# Altium PCB FAFMACMU_ControlPanel-V3-031115.PcbDoc (part 3 of 3)
Units mm, origin at the board's own origin, x right, y up, seen from the top; angles counter-clockwise.
Board outline 264 x 75.64 mm, 2 copper layers (Top Layer, Bottom Layer), stack 1.66 mm thick; 185 components, 162 nets, 766 pads, 792 vias.
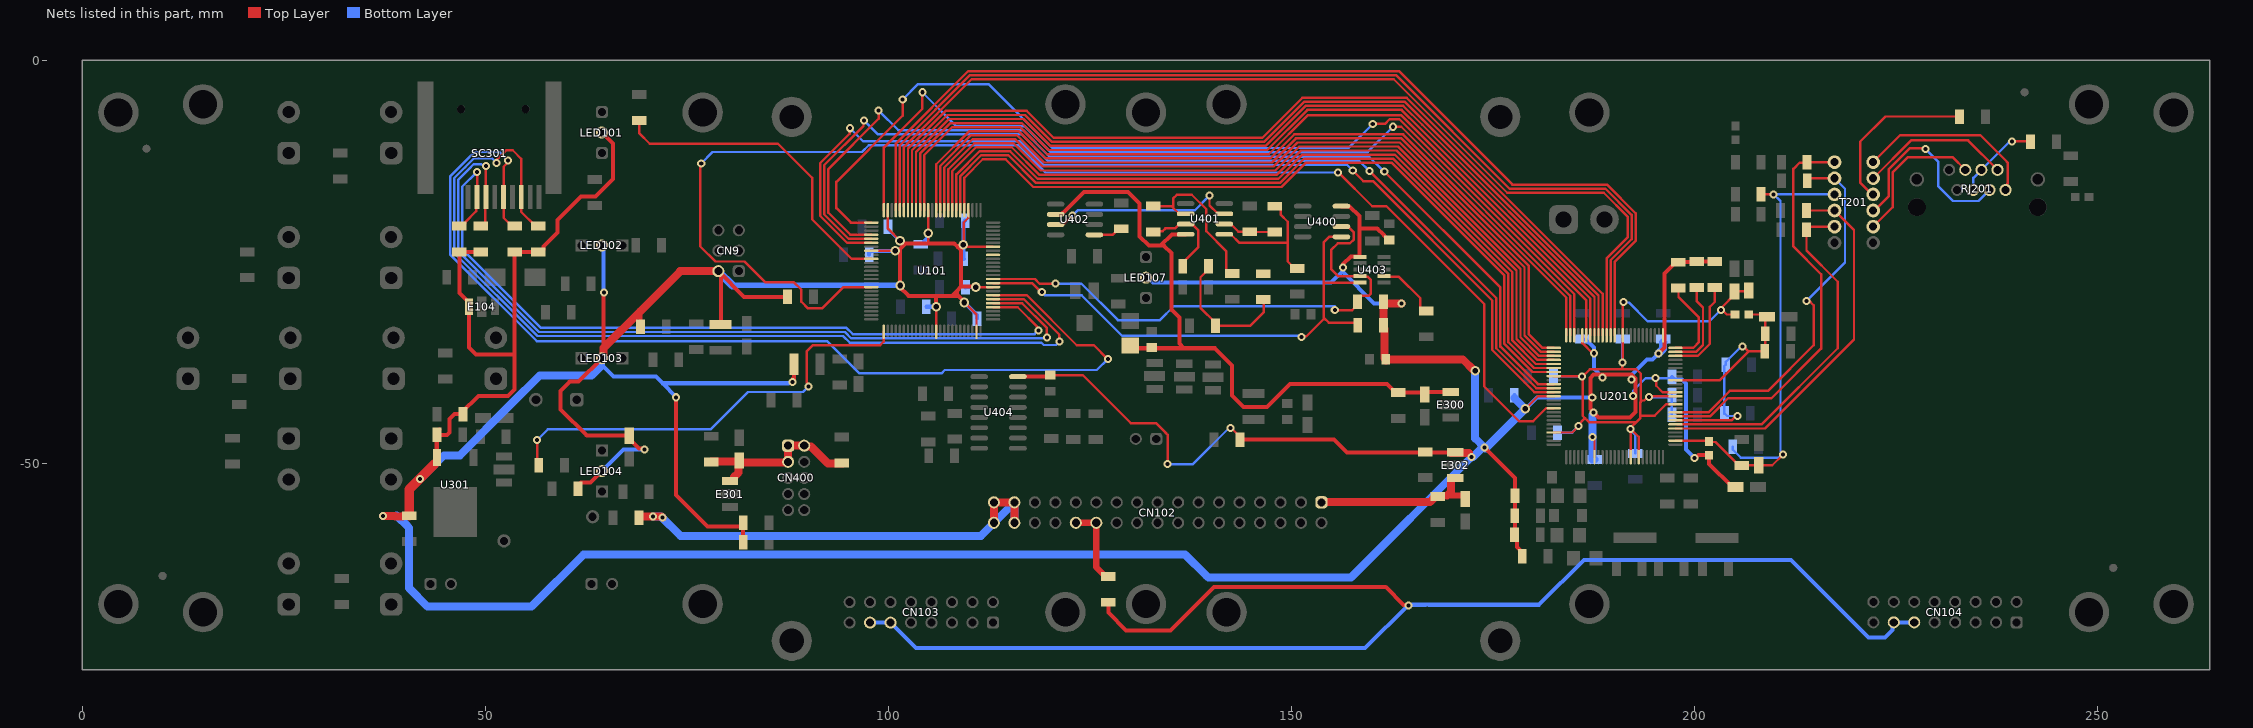
[diagram p3: the nets of this part, all layers, seen from the top]

## Via types
v1: diameter 1, hole 0.5, Top Layer to Bottom Layer, tented both sides, 636 vias
v2: diameter 1, hole 0.5, Top Layer to Bottom Layer, 146 vias
v3: diameter 1.2, hole 0.7, Top Layer to Bottom Layer, tented top, 9 vias
v4: diameter 1.2, hole 0.7, Top Layer to Bottom Layer, 1 vias

## Nets (pads, with @x,y where several pads share a name; then routed paths per layer and width w, separated by ;. In a path a pad name is that pad's centre, name@x,y a point inside that pad or via, vN(x,y) a via of type N, cw(c..) or ccw(c..) an arc to the next point about the centre after c; other vN are vias at no path point) (continued)
NetR207_1: R207.1 U201.23 | length 12.1
  Top Layer w0.3: U201.23@197.69,-36.71 200.46,-36.71 201.94,-35.23 201.94,-30.63 202.58,-29.99 R207.1@202.58,-28.21
NetR208_1: R208.1 U201.24 | length 11.2
  Top Layer w0.3: U201.24@197.69,-36.21 200.253,-36.21 201.1,-35.363 201.1,-30.71 200.35,-29.96 R208.1@200.35,-28.21
NetR209_1: R209.1 U201.25 | length 11
  Top Layer w0.3: U201.25@197.69,-35.71 199.89,-35.71 200.6,-35 200.6,-31.95 198.06,-29.41 R209.1@198.06,-28.29
NetR211_1: R211.1 T201.2 U201.9 | length 48
  Top Layer w0.3: U201.9@197.69,-43.71 201.77,-43.71 204.425,-41.055 209.151,-41.055 214.836,-35.37 214.836,-30.446 214.244,-29.854 213.996,-29.854 v2(213.94,-29.91) ; R211.1@214.04,-14.97 214.34,-14.67 T201.2@217.42,-14.67
  Bottom Layer w0.3: v2(213.94,-29.91) 218.72,-25.13 218.72,-15.97 T201.2@217.42,-14.67
NetR212_1: R212.1 T201.1 U201.8 | length 50.7
  Top Layer w0.3: U201.8@197.69,-44.21 201.977,-44.21 204.217,-41.97 209.59,-41.97 215.75,-35.81 215.75,-26.58 212.31,-23.14 212.31,-13.51 213.1,-12.72 213.97,-12.72 R212.1@214.02,-12.67 T201.1@217.42,-12.67
NetR213_2: R213.2 T201.4 U201.5 | length 47.2
  Top Layer w0.3: U201.5@197.69,-45.71 199.16,-45.71 208.79,-45.71 213.754,-40.746 219.84,-34.66 219.84,-21.09 T201.4@217.42,-18.67 R213.2@213.93,-18.67
NetR214_2: R214.2 T201.5 U201.6 | length 43.8
  Top Layer w0.3: U201.6@197.88,-45.21 208.37,-45.21 217.826,-35.754 217.826,-27.516 213.94,-23.63 R214.2@213.94,-21.05 214.32,-20.67 T201.5@217.42,-20.67
NetR215_2: R215.2 T201.10 | length 20.9
  Top Layer w0.3: T201.10@222.22,-16.67 222.07,-16.67 220.6,-15.2 220.6,-10.14 223.73,-7.01 R215.2@232.94,-7.01
NetR216_2: R216.2 RJ201.4 RJ201.5 | length 10.5
  Top Layer w0.3: v2(239.46,-10.09) 241.7,-10.09 R216.2@241.74,-10.13
  Bottom Layer w0.3: RJ201.5@234.64,-16.12 234.64,-14.62 RJ201.4@235.64,-13.62 239.036,-10.224 239.326,-10.224 v2(239.46,-10.09)
NetR301_2: R301.2 SC301.7 U101.31 | length 120.4
  Top Layer w0.3: v2(51.43,-12.76) 51.43,-12.413 52.646,-11.197 53.434,-11.197 54.5,-12.263 SC301.7@54.5,-17 54.5,-18.85 56.25,-20.6 R301.2@56.6,-20.6 ; U101.31@113.02,-29.67 116.831,-29.67 121.25,-34.089 v2(121.25,-34.93)
  Bottom Layer w0.3: v2(51.43,-12.76) 50.89,-12.22 48.6,-12.22 47.791,-13.029 47.54,-13.28 46.16,-14.66 46.16,-23.903 56.497,-34.24 94.43,-34.24 95.25,-35.06 119.006,-35.06 119.306,-35.36 120.82,-35.36 v2(121.25,-34.93)
NetR302_2: R302.2 SC301.5 U101.32 | length 133.7
  Top Layer w0.3: v2(52.85,-12.482) 52.85,-12.683 52.3,-13.234 52.3,-19.57 53.33,-20.6 R302.2@53.68,-20.6 ; U101.32@113.02,-29.17 117.205,-29.17 123.415,-35.38 125.53,-35.38 127.24,-37.09 v2(127.265,-37.09)
  Bottom Layer w0.3: v2(52.85,-12.482) 51.778,-11.41 48.703,-11.41 47.584,-12.529 47.142,-12.97 45.66,-14.452 45.66,-24.11 56.42,-34.87 92.43,-34.87 96.44,-38.88 106.617,-38.88 107.036,-38.461 125.894,-38.461 v2(127.265,-37.09)
NetR303_2: R303.2 SC301.2 U101.30 | length 107.7
  Top Layer w0.3: R303.2@49.48,-20.6 49.64,-20.6 50.04,-20.2 50.04,-17.06 SC301.2@50.1,-17 50.1,-13.2 v2(50.13,-13.17) ; U101.30@113.02,-30.17 116.624,-30.17 119.7,-33.246 v2(119.7,-34.41)
  Bottom Layer w0.3: v2(50.13,-13.17) 49.773,-13.17 49.543,-12.94 48.587,-12.94 47.998,-13.529 47.992,-13.535 46.66,-14.867 46.66,-23.696 56.704,-33.74 94.637,-33.74 95.407,-34.51 119.6,-34.51 v2(119.7,-34.41)
NetR304_2: R304.2 SC301.1 U101.29 | length 101.2
  Top Layer w0.3: R304.2@46.81,-20.6 47.16,-20.6 47.56,-20.2 47.56,-20.1 48.912,-18.748 48.912,-17.088 49.033,-16.967 49.033,-13.923 v2(49,-13.89) ; U101.29@113.02,-30.67 116.094,-30.67 118.65,-33.226 v2(118.65,-33.54)
  Bottom Layer w0.3: v2(49,-13.89) 47.16,-15.73 47.16,-23.45 56.95,-33.24 94.844,-33.24 95.614,-34.01 118.18,-34.01 v2(118.65,-33.54)
NetR312_1: R312.1 U101.1 | length 55.3
  Top Layer w0.3: v2(56.47,-47.14) 56.47,-50.06 R312.1@56.67,-50.26 ; v2(90.14,-40.49) 90.006,-40.356 90.006,-40.039 89.931,-39.964 89.931,-36.115 90.676,-35.37 99.03,-35.37 99.47,-34.93 U101.1@99.47,-33.72
  Bottom Layer w0.3: v2(56.47,-47.14) 57.78,-45.83 77.99,-45.83 82.63,-41.19 89.44,-41.19 v2(90.14,-40.49)
NetR315_1: R315.1 U101.85 | length 39.8
  Top Layer w0.3: R315.1@69.15,-7.5 69.15,-9.11 70.43,-10.39 86.349,-10.39 90.59,-14.631 90.59,-19.769 95.491,-24.67 U101.85@97.92,-24.67
NetR400_1: R400.1 R402.2 U401.1 | length 17.5
  Top Layer w0.3: U401.1@141.72,-21.62 142.52,-21.62 143.58,-22.68 149.54,-22.68 ; R400.1@147.98,-18.14 148.33,-18.14 148.73,-18.54 148.73,-19.21 149.58,-20.06 149.58,-22.68 149.58,-25 150.43,-25.85 R402.2@150.78,-25.85
NetR400_2: R400.2 R401.1 U401.2 | length 6.7
  Top Layer w0.3: U401.2@141.72,-20.35 142.52,-20.35 143.47,-21.3 R401.1@144.87,-21.3 144.91,-21.34 R400.2@147.98,-21.34
NetR403_2: R403.2 U402.5 | length 3.7
  Top Layer w0.3: U402.5@125.59,-21.69 127.84,-21.69 128.59,-20.94 R403.2@128.94,-20.94
NetR405_1: R405.1 U101.35 U400.5 U403.5 | length 65.8
  Top Layer w0.3: U101.35@113.02,-27.67 117.86,-27.67 118.98,-28.79 v2(119.07,-28.79) ; v2(151.28,-34.38) 151.387,-34.273 151.917,-34.273 154.05,-32.14 154.05,-31.96 ; U400.5@156.24,-21.94 154.72,-21.94 154.04,-22.62 154.04,-27.61 154.05,-27.62 ; R405.1@158.265,-32.89 157.975,-32.6 154.69,-32.6 154.14,-32.05 154.05,-31.96 ; U403.5@158.54,-27.61 158.53,-27.62 154.05,-27.62 ; 154.05,-31.96 154.05,-27.62
  Bottom Layer w0.3: v2(119.07,-28.79) 119.48,-29.2 124.034,-29.2 129.035,-34.201 151.101,-34.201 v2(151.28,-34.38)
NetR406_1: R406.1 U101.36 U400.6 U403.4 | length 66.6
  Top Layer w0.3: U101.36@113.02,-27.17 118.214,-27.17 118.794,-27.75 v2(120.78,-27.75) ; v2(155.42,-31.02) 157.59,-31.02 158.25,-30.36 R406.1@158.25,-30.01 158.25,-29.667 158.65,-29.267 159.583,-29.267 159.9,-28.95 159.9,-27.284 159.526,-26.91 159.366,-26.91 158.64,-26.91 U403.4@158.54,-26.81 158.505,-26.845 155.865,-26.845 154.96,-25.94 154.96,-23.58 155.8,-22.74 157.3,-22.74 157.79,-22.251 157.79,-21.42 157.04,-20.67 U400.6@156.24,-20.67
  Bottom Layer w0.3: v2(120.78,-27.75) 123.998,-27.75 128.518,-32.27 133.729,-32.27 135.449,-30.55 155.409,-30.55 v2@155.449,-30.59
NetR407_1: R407.1 R409.2 R411.1 | length 16.8
  Top Layer w0.3: R411.1@139.76,-25.6 139.76,-25.95 138.76,-26.95 138.76,-30.75 140.61,-32.6 R407.1@140.61,-32.95 144.96,-32.95 146.63,-31.28 146.63,-29.8 R409.2@146.54,-29.71
NetR409_1: R409.1
NetR410_1: R410.1 R413.2 U401.6 | length 20.1
  Top Layer w0.3: R413.2@132.9,-18.13 135.17,-18.13 135.37,-18.33 ; U401.6@136.92,-19.08 136.12,-19.08 135.37,-18.33 ; R410.1@142.69,-26.48 142.34,-26.48 141.94,-26.08 141.94,-23.701 139.47,-21.231 139.47,-18.499 137.681,-16.71 135.83,-16.71 135.37,-17.17 135.37,-18.33
NetR411_2: R411.2 R413.1 U401.7 | length 11.6
  Top Layer w0.3: R413.1@132.9,-21.33 133.004,-21.226 134.074,-21.226 134.411,-20.889 135.581,-20.889 136.12,-20.35 137.72,-20.35 138.47,-21.1 138.47,-23.26 136.96,-24.77 136.96,-25.2 R411.2@136.56,-25.6
NetR412_1: R412.1 U403.7 | length 7.7
  Top Layer w0.3: U403.7@161.54,-26.81 161.64,-26.91 163.39,-26.91 166.04,-29.56 166.04,-30.74 166.44,-31.14 R412.1@166.79,-31.14
NetRJ201_1: RJ201.1 T201.12 | length 23
  Top Layer w0.3: T201.12@222.22,-12.67 225.55,-9.34 235.528,-9.34 238.79,-12.602 238.9,-12.712 238.9,-15.344 238.87,-15.375 238.87,-15.89 238.79,-15.97 RJ201.1@238.64,-16.12
NetRJ201_2: RJ201.2 T201.11 | length 18.9
  Top Layer w0.3: T201.11@222.22,-14.67 226.92,-9.97 233.99,-9.97 RJ201.2@237.64,-13.62
NetRJ201_3: RJ201.3 T201.9 | length 24.6
  Top Layer w0.3: T201.9@222.22,-18.67 222.39,-18.67 224.13,-16.93 224.13,-13.57 226.74,-10.96 228.628,-10.96 v2(228.718,-11.05)
  Bottom Layer w0.3: v2(228.718,-11.05) 230.3,-12.632 230.3,-15.67 232.12,-17.49 235.27,-17.49 RJ201.3@236.64,-16.12
NetRJ201_6: RJ201.6 T201.8 | length 18.2
  Top Layer w0.3: T201.8@222.22,-20.67 224.63,-18.26 224.63,-13.95 226.54,-12.04 232.06,-12.04 RJ201.6@233.64,-13.62
NetU101_42: U101.42
NetU101_55: U101.55 U201.57 | length 96.5
  Top Layer w0.3: U101.55@109.47,-18.62 109.47,-14.604 111.754,-12.32 114.583,-12.32 118.013,-15.75 148.82,-15.75 151.84,-12.73 162.45,-12.73 176.46,-26.74 176.46,-35.158 176.465,-35.228 179.947,-38.71 U201.57@182.59,-38.71
NetU101_56: U101.56 U201.56 | length 97.3
  Top Layer w0.3: U101.56@108.97,-18.62 108.97,-14.397 111.547,-11.82 114.929,-11.82 118.359,-15.25 148.613,-15.25 151.633,-12.23 162.66,-12.23 176.96,-26.53 176.96,-34.951 176.965,-35.021 180.154,-38.21 U201.56@182.59,-38.21
NetU101_57: U101.57 U201.55 | length 98.1
  Top Layer w0.3: U101.57@108.47,-18.62 108.47,-14.19 111.34,-11.32 115.136,-11.32 118.566,-14.75 148.406,-14.75 151.426,-11.73 162.867,-11.73 177.46,-26.323 177.46,-34.744 177.465,-34.814 180.361,-37.71 U201.55@182.59,-37.71
NetU101_58: U101.58 U201.54 | length 99.1
  Top Layer w0.3: U101.58@107.97,-18.62 107.97,-15.041 107.97,-13.768 110.918,-10.82 115.343,-10.82 118.773,-14.25 148.199,-14.25 151.219,-11.23 163.074,-11.23 177.96,-26.116 177.96,-34.536 177.965,-34.606 180.568,-37.21 U201.54@182.59,-37.21
NetU101_59: U101.59 U201.53 | length 99.9
  Top Layer w0.3: U101.59@107.47,-18.62 107.47,-15.248 107.47,-13.561 110.711,-10.32 115.55,-10.32 118.94,-13.71 148.032,-13.71 151.012,-10.73 163.281,-10.73 178.46,-25.909 178.46,-34.329 178.465,-34.399 180.775,-36.71 U201.53@182.59,-36.71
NetU101_60: U101.60 U201.52 | length 100.7
  Top Layer w0.3: U101.60@106.97,-18.62 106.97,-15.455 106.97,-13.354 110.504,-9.82 115.758,-9.82 119.148,-13.21 147.824,-13.21 150.804,-10.23 163.488,-10.23 178.96,-25.702 178.96,-34.122 178.96,-34.138 178.962,-34.161 178.965,-34.192 179.134,-34.362 180.993,-36.21 U201.52@182.59,-36.21
NetU101_61: U101.61 U201.51 | length 101.5
  Top Layer w0.3: U101.61@106.47,-18.62 106.47,-15.663 106.47,-13.147 110.297,-9.32 115.965,-9.32 119.355,-12.71 147.617,-12.71 150.597,-9.73 163.696,-9.73 179.46,-25.494 179.46,-33.97 181.2,-35.71 U201.51@182.59,-35.71
NetU101_62: U101.62 U201.50 | length 101.3
  Top Layer w0.3: U101.62@105.97,-18.62 105.97,-12.94 110.09,-8.82 116.172,-8.82 119.562,-12.21 147.41,-12.21 150.39,-9.23 163.903,-9.23 184.14,-29.467 U201.50@184.14,-34.16
NetU101_65: U101.65 U201.45 | length 107.7
  Top Layer w0.3: U101.65@104.47,-18.62 104.47,-11.814 107.964,-8.32 116.379,-8.32 119.749,-11.69 147.223,-11.69 152.083,-6.83 163.647,-6.83 186.64,-29.823 U201.45@186.64,-34.16
NetU101_66: U101.66 U201.44 | length 109.4
  Top Layer w0.3: U101.66@103.97,-18.62 103.97,-11.607 107.757,-7.82 116.586,-7.82 119.926,-11.16 147.046,-11.16 152.016,-6.19 163.714,-6.19 165.77,-8.246 187.14,-29.616 U201.44@187.14,-34.16
NetU101_67: U101.67 U201.43 | length 111.1
  Top Layer w0.3: U101.67@103.47,-18.62 103.47,-11.4 107.55,-7.32 116.793,-7.32 120.133,-10.66 146.839,-10.66 151.809,-5.69 163.922,-5.69 166.27,-8.038 187.64,-29.409 U201.43@187.64,-34.16
NetU101_68: U101.68 U201.42 | length 112.8
  Top Layer w0.3: U101.68@102.97,-18.62 102.97,-11.193 107.343,-6.82 117,-6.82 120.34,-10.16 146.632,-10.16 151.602,-5.19 164.129,-5.19 188.14,-29.201 U201.42@188.14,-34.16
NetU101_69: U101.69 U201.41 | length 114.4
  Top Layer w0.3: U101.69@102.47,-18.62 102.47,-10.986 107.136,-6.32 117.207,-6.32 120.547,-9.66 146.425,-9.66 151.395,-4.69 164.336,-4.69 188.64,-28.994 U201.41@188.64,-34.16
NetU101_70: U101.70 U201.40 | length 123.5
  Top Layer w0.3: U101.70@101.97,-18.14 101.97,-10.779 110.369,-2.38 162.733,-2.38 176.817,-16.464 188.787,-16.464 191.747,-19.424 191.747,-22.021 189.14,-24.628 U201.40@189.14,-34.16
NetU101_71: U101.71 U201.39 | length 125.6
  Top Layer w0.3: U101.71@101.47,-18.62 101.47,-10.572 110.162,-1.88 163.031,-1.88 177.116,-15.964 188.994,-15.964 192.247,-19.217 192.247,-22.228 189.64,-24.835 189.64,-28.9 U201.39@189.64,-34.16
NetU101_72: U101.72 U201.38 | length 127.3
  Top Layer w0.3: U101.72@100.97,-18.62 100.97,-10.364 109.954,-1.38 163.377,-1.38 177.462,-15.464 189.202,-15.464 192.747,-19.01 192.747,-22.435 190.14,-25.042 U201.38@190.14,-34.16
NetU101_75: U101.75 U201.49 | length 115
  Top Layer w0.3: U101.75@99.47,-18.62 99.47,-17.87 99.47,-17.663 99.48,-17.653 99.48,-10.84 104.25,-6.07 v2(104.25,-4) ; v2(162.63,-8.28) 163.66,-8.28 184.64,-29.26 U201.49@184.64,-34.16
  Bottom Layer w0.3: v2(104.25,-4) 108.45,-8.2 116.943,-8.2 120.163,-11.42 159.49,-11.42 v2(162.63,-8.28)
NetU101_76: U101.76 U201.48 | length 124.9
  Top Layer w0.3: U101.76@97.92,-20.17 95.38,-20.17 93.59,-18.38 93.59,-15.12 101.82,-6.89 v2(101.82,-4.9) ; v2(160.13,-7.92) 161.646,-7.92 162.236,-7.33 163.417,-7.33 185.14,-29.053 U201.48@185.14,-34.16
  Bottom Layer w0.3: v2(101.82,-4.9) 103.73,-2.99 112.44,-2.99 120.37,-10.92 157.13,-10.92 v2(160.13,-7.92)
NetU101_79: U101.79 U201.60 | length 123.8
  Top Layer w0.3: U101.79@97.92,-21.67 95.32,-21.67 92.59,-18.94 92.59,-13.52 98.82,-7.29 v2(98.82,-6.26) ; v2(161.56,-13.84) 175.96,-28.24 175.96,-35.553 180.617,-40.21 U201.60@182.59,-40.21
  Bottom Layer w0.3: v2(98.82,-6.26) 101.26,-8.7 116.736,-8.7 120.056,-12.02 159.7,-12.02 161.52,-13.84 v2(161.56,-13.84)
NetU101_80: U101.80 U201.61 | length 123.8
  Top Layer w0.3: v2(97,-7.49) 96.948,-7.542 96.948,-8.182 92.09,-13.04 92.09,-19.147 95.113,-22.17 U101.80@97.92,-22.17 ; v2(159.73,-13.79) 175.46,-29.52 175.46,-35.76 180.41,-40.71 U201.61@182.59,-40.71
  Bottom Layer w0.3: v2(97,-7.49) 98.71,-9.2 116.529,-9.2 119.849,-12.52 158.46,-12.52 v2(159.73,-13.79)
NetU101_81: U101.81 U201.62 | length 124.6
  Top Layer w0.3: v2(95.293,-8.463) 95.234,-8.522 95.234,-9.147 91.59,-12.791 91.59,-19.354 94.906,-22.67 U101.81@97.92,-22.67 ; v2(157.65,-13.71) 158.96,-15.02 160.143,-15.02 174.96,-29.837 174.96,-35.98 180.19,-41.21 U201.62@182.59,-41.21
  Bottom Layer w0.3: v2(95.293,-8.463) 96.9,-10.07 116.35,-10.07 119.3,-13.02 156.96,-13.02 v2(157.65,-13.71)
NetU101_92: U101.92 U201.66 | length 164.3
  Top Layer w0.3: v2(76.825,-12.826) 76.68,-12.97 76.68,-23.097 78.583,-25 82.197,-25 84.787,-27.59 88.32,-27.59 89.24,-28.51 89.24,-29.996 90.064,-30.82 91.81,-30.82 94.46,-28.17 U101.92@97.92,-28.17 ; v2(155.82,-13.97) 155.897,-13.97 160.063,-18.137 161.823,-18.137 173.96,-30.274 173.96,-40.5 178.28,-44.82 180.023,-44.82 181.633,-43.21 181.84,-43.21 U201.66@182.59,-43.21
  Bottom Layer w0.3: v2(76.825,-12.826) 78.24,-11.41 96.772,-11.41 97.612,-10.57 116.143,-10.57 119.533,-13.96 155.81,-13.96 v2(155.82,-13.97)
NetU401_3: U401.3 U402.3 | length 24.1
  Top Layer w0.3: U402.3@120.79,-20.42 121.671,-20.42 121.821,-20.27 121.9,-20.27 v2(122.888,-19.281) ; v2(139.88,-16.82) 139.88,-18.04 140.92,-19.08 U401.3@141.72,-19.08
  Bottom Layer w0.3: v2(122.888,-19.281) 123.51,-18.66 138.04,-18.66 v2(139.88,-16.82)
V1.8A: C212.2 C213.2 C222.1 C223.2 C224.2 FT203.2 U201.7 U201.17 | length 39.3
  Top Layer w0.3: U201.7@197.69,-44.71 204.621,-44.71 205.171,-44.16 v2(205.36,-44.16) ; U201.17@197.69,-39.71 203.194,-39.71 206.754,-36.15 ; v2(206.03,-35.53) 206.134,-35.53 206.754,-36.15 ; FT203.2@206.77,-31.57 208.75,-31.57 C222.1@209.03,-31.85 208.82,-32.06 C223.2@208.82,-33.96 208.82,-36.1 C224.2@208.77,-36.15 206.754,-36.15
  Bottom Layer w0.3: C213.2@203.74,-43.87 203.74,-37.983 C212.2@203.929,-37.793 203.929,-37.443 205.843,-35.53 v2(206.03,-35.53) ; C213.2@203.77,-43.82 204.11,-44.16 v2(205.36,-44.16)
V1.8D: C201.1 C202.1 C203.1 C204.1 C205.1 C206.1 C220.1 C221.1 FT203.1 U201.11 U201.13 U201.36 U201.58 U201.72 U201.92 U201.94 | length 98.7
  Top Layer w0.3: U201.72@182.59,-46.21 184.881,-46.21 v2(185.671,-45.42) 185.515,-45.42 185.5,-45.405 186.472,-44.433 ; U201.58@182.59,-39.21 v2@186.088,-39.21 ; v2@186.121,-39.211 v2@186.17,-39.26 ; 191.11,-38.36 v2(191.11,-37.5) 191.14,-37.47 U201.36@191.14,-34.16 191.14,-30.1 v2(191.22,-30.02) ; U201.92@192.14,-49.26 v2@192.14,-45.76 ; U201.94@193.14,-49.26 193.14,-46.76 v2@192.14,-45.76 ; 193.38,-42.45 193.38,-41.53 193.38,-38.91 192.83,-38.36 187.07,-38.36 v2@186.17,-39.26 ; v2@194.24,-41.82 193.823,-42.238 193.552,-42.238 193.34,-42.45 193.34,-44.03 ; v2@194.43,-41.71 U201.13@197.69,-41.71 ; U201.11@197.69,-42.71 196.526,-42.71 195.116,-44.12 193.43,-44.12 193.34,-44.03 ; v2(203.31,-31.02) 203.499,-31.02 204.049,-31.57 FT203.1@205.07,-31.57 ; v2@203.444,-30.666 205.01,-29.1 C221.1@205.01,-28.7 206.65,-28.7 C220.1@206.76,-28.81 ; v2@186.17,-39.26 186.17,-44.13 187,-44.96 192.78,-44.96 ; v2@192.14,-45.76 v2(192.13,-45.75) 192.13,-45.61 192.78,-44.96 ; 192.78,-44.96 193.34,-44.4 193.34,-44.03
  Bottom Layer w0.3: C203.1@182.56,-39.24 182.565,-39.245 v2(186.088,-39.245) ; C204.1@183.04,-46.22 184.871,-46.22 v2(185.671,-45.42) ; v2(191.11,-37.5) 191.11,-34.64 C202.1@191.14,-34.61 ; v2(191.22,-30.02) 191.284,-30.084 191.9,-30.084 194.226,-32.41 201.92,-32.41 v2(203.31,-31.02) ; v2(192.13,-45.75) 192.13,-45.939 192.69,-46.499 C201.1@192.69,-48.81 ; v2(194.43,-41.82) 197.03,-41.82 C205.1@197.24,-41.61 C206.1@197.24,-44.01
V3.3: C105.1 C106.1 C107.1 C108.2 C109.2 C110.2 C111.2 C112.2 C207.2 C208.2 C209.2 C210.2 C211.2 C217.1 C305.2 C306.1 C307.2 C400.1 C405.1 C407.1 CN9.2 E104.1 E302.1 FT201.1 L101.1 L102.1 LED101.2 LED102.2 LED103.2 LED104.2 LED107.2 R101.2 R102.1 R104.2 R105.2 R106.2 R107.2 R203.2 R204.2 R205.2 R206.2 R207.2 R208.2 R209.2 R301.1 R302.1 R303.1 R304.1 R307.2 R313.2 R405.2 R406.2 U101.14 U101.24 U101.34 U101.44 U101.54 U101.64 U101.74 U101.83 U201.14 U201.26 U201.46 U201.63 U201.83 U301.3 U400.8 U403.1 U404.16 | length 793.2
  Top Layer w0.3: U101.83@97.92,-23.67 v3@100.56,-23.67 ; U101.74@99.97,-18.62 99.97,-20.91 v3@101.505,-22.445 ; v3(101.48,-22.41) 101.724,-22.41 102.054,-22.74 102.19,-22.74 ; 104.96,-22.74 104.96,-21.49 v3(104.97,-21.48) U101.64@104.97,-18.62 ; U101.14@105.97,-33.72 v3(105.97,-30.62) ; v3(109.341,-22.917) v3@109.39,-22.917 ; v3@109.39,-22.922 v3@109.39,-22.917 ; v3(109.47,-30.08) 110.97,-31.58 U101.24@110.97,-33.72 ; U101.54@109.97,-18.62 109.97,-19.577 109.39,-20.157 v3@109.39,-22.917 ; v3(110.87,-28.17) U101.34@113.02,-28.17 ; U101.44@113.02,-23.17 109.838,-23.17 109.585,-22.917 v3@109.39,-22.917 ; C407.1@120.11,-39.09 124.16,-39.09 130.11,-45.04 133.227,-45.04 134.47,-46.283 134.68,-46.493 v2(134.68,-50.14) ; v2(142.49,-45.63) 142.54,-45.63 143.65,-46.74 R107.2@143.65,-47.09 ; v4(179.04,-43.27) 179.06,-43.27 180.62,-41.71 U201.63@182.59,-41.71 ; U201.46@186.14,-34.16 186.14,-35.117 187.403,-36.38 v2(187.6,-36.38) ; v2(187.4,-46.786) 187.4,-46.976 187.64,-47.216 U201.83@187.64,-49.26 ; v2(195.19,-39.46) 195.3,-39.57 195.3,-40.41 196.1,-41.21 U201.14@197.69,-41.21 ; U201.26@196.14,-34.16 196.14,-33.41 196.34,-33.21
  Top Layer w0.5: C307.2@44,-46.2 C307.2@44.33,-45.87 ; U301.3@44.01,-49.295 C307.2@44.01,-46.51 ; U301.3@44.015,-49.845 U301.3@44.015,-49.295 ; C307.2@44.04,-46.51 45.27,-46.51 45.59,-46.19 45.59,-44.55 46.21,-43.93 C305.2@47.26,-43.93 ; C305.2@47.085,-43.755 49.18,-41.66 52.84,-41.66 53.65,-40.85 53.65,-36.56 ; R303.1@49.48,-23.8 R304.1@46.81,-23.8 46.81,-28.91 48.01,-30.11 E104.1@48.01,-30.61 48.01,-35.68 48.89,-36.56 53.65,-36.56 ; R307.2@61.53,-53.51 R307.2@61.53,-53.16 61.53,-52.81 61.93,-52.41 63.09,-52.41 LED104.2@64.5,-51 ; LED101.2@64.5,-9 65.881,-10.381 65.881,-14.786 63.728,-16.94 61.9,-16.94 59.01,-19.83 59.01,-21.39 57.25,-23.15 57.25,-23.5 56.95,-23.8 R301.1@56.6,-23.8 R302.1@53.68,-23.8 53.65,-23.83 53.65,-36.56 ; LED103.2@64.691,-36.809 LED103.2@64.5,-37 61.59,-39.91 60.51,-39.91 59.38,-41.04 59.38,-43.37 62.62,-46.61 C306.1@67.91,-46.61 67.91,-47.01 69.104,-48.204 69.714,-48.204 v2(69.81,-48.3) ; 64.691,-35.749 64.691,-28.949 64.77,-28.87 v2(64.77,-28.84) ; R101.2@69.28,-33.07 69.28,-31.16 ; v2(73.68,-41.84) 73.68,-53.981 77.589,-57.89 81.95,-57.89 82.03,-57.97 R104.2@82.03,-59.8 ; 74.18,-26.26 74.18,-26.2 ; CN9.2@78.772,-26.2 78.856,-26.284 78.856,-26.2 CN9.2@78.94,-26.2 82.14,-29.4 R102.1@87.53,-29.4 ; L102.1@79.21,-32.8 79.28,-32.73 CN9.2@79.28,-26.811 ; R105.2@82.03,-57.7 R105.2@82.03,-57.42 ; v2(88.13,-39.96) 88.226,-39.864 88.226,-39.514 88.34,-39.4 ; v2@88.34,-39.96 88.34,-39.4 ; L101.1@88.35,-37.74 88.34,-37.75 88.34,-39.4 ; v3@100.56,-23.67 v3(100.889,-23.67) ; v3@101.47,-27.924 101.47,-23.46 102.19,-22.74 108.21,-22.74 108.635,-23.165 ; v3@101.48,-22.599 v3(101.48,-22.41) ; v3@101.51,-28.2 102.48,-29.17 102.56,-29.25 105.97,-29.25 ; v3(105.97,-30.62) 105.97,-29.25 ; 107.93,-29.25 108.53,-28.65 ; 108.6,-29.25 105.97,-29.25 ; v3(109.341,-22.917) 109.207,-23.051 108.749,-23.051 108.635,-23.165 ; v3(109.47,-30.08) 109.47,-30.051 108.53,-29.111 108.53,-28.65 ; v3(110.87,-28.17) 110.82,-28.12 109.06,-28.12 ; U404.16@116.11,-39.28 119.92,-39.28 C407.1@120.11,-39.09 ; R107.2@143.65,-47.09 155.308,-47.09 156.928,-48.71 169.82,-48.71 E302.1@169.84,-48.73 ; U400.8@156.24,-18.13 156.259,-18.149 157.259,-18.149 158.47,-19.36 158.47,-20.88 158.5,-20.88 ; v1(156.43,-25.75) 156.43,-25.33 157.41,-24.35 U403.1@158.25,-24.35 ; U403.1@158.54,-24.41 158.5,-24.41 158.5,-20.88 ; R405.2@161.295,-33.06 R405.2@161.603,-33.367 ; R406.2@161.45,-30.01 161.458,-30.018 R406.2@161.64,-30.2 ; R405.2@161.458,-32.882 R405.2@161.465,-32.89 ; C405.1@161.603,-37.003 C405.1@161.74,-37.14 ; C400.1@162.16,-22.31 162.06,-22.31 161.5,-21.75 161.5,-21.692 160.688,-20.88 158.5,-20.88 ; v3@172.71,-38.54 v3(172.84,-38.54) ; v2(173.97,-48.06) 176.455,-50.545 177.78,-51.87 R204.2@177.78,-54.056 177.78,-56.5 R206.2@177.75,-56.53 177.75,-58.87 R205.2@177.71,-58.91 178.01,-59.21 178.01,-60.419 178.37,-60.779 178.37,-60.92 178.67,-61.22 R203.2@178.67,-61.57 ; v2@188.49,-39.04 188.64,-39.19 v2(188.64,-39.363) ; v2@192.74,-39.61 v2@192.74,-39.52 ; v2(195.59,-36.4) 196.34,-35.65 196.34,-33.21 196.34,-26.46 197.71,-25.09 R209.2@198.06,-25.09 198.1,-25.05 200.31,-25.05 R208.2@200.35,-25.01 R207.2@202.58,-25.01 ; v2(200.03,-49.35) 200.219,-49.35 200.539,-49.03 FT201.1@201.87,-49.03 201.87,-50.11 204.74,-52.98 C217.1@205.14,-52.98 ; 108.53,-28.65 109.06,-28.12 ; 108.635,-23.165 109.06,-23.59 109.06,-28.12 ; v2@192.74,-39.52 192.74,-43.66 192.04,-44.36 188.16,-44.36 v2(187.52,-43.72) 187.12,-43.32 187.12,-41.66 187.12,-39.44 187.52,-39.04 192.26,-39.04 v2@192.74,-39.52
  Top Layer w1: v2(37.33,-56.55) 38.841,-56.55 38.911,-56.62 39.767,-56.62 39.797,-56.59 40.19,-56.59 40.24,-56.54 R313.2@40.59,-56.54 ; LED103.2@64.691,-36.809 64.691,-35.749 69.28,-31.16 74.18,-26.26 ; 74.18,-26.2 CN9.2@78.772,-26.2 ; R405.2@161.458,-32.882 R406.2@161.458,-30.018 ; C405.1@161.603,-37.003 R405.2@161.603,-33.367 ; R406.2@161.64,-30.2 v2(163.7,-30.2) ; C405.1@161.79,-37.29 161.79,-37.13 171.3,-37.13 v3@172.71,-38.54 ; E302.1@169.84,-48.73 172.046,-48.73
  Top Layer w1.2: R313.2@40.59,-56.54 40.59,-53.26 U301.3@43.755,-50.095
  Bottom Layer w0.3: C106.1@99.97,-20.67 99.97,-21.02 101.36,-22.41 v3(101.48,-22.41) ; v2(134.68,-50.14) 137.815,-50.14 142.325,-45.63 v2(142.49,-45.63) ; v2(192.43,-41.67) 192.43,-41.036 194.006,-39.46 197.13,-39.46 C209.2@197.24,-39.35
  Bottom Layer w0.5: LED104.2@64.5,-51 67.2,-48.3 v2(69.81,-48.3) ; 64.5,-37.85 65.94,-39.29 71.19,-39.29 72,-40.1 ; LED103.2@64.5,-37.231 LED103.2@64.5,-37 ; LED102.2@64.5,-23 64.674,-23.174 64.674,-28.744 v2(64.77,-28.84) ; v2(73.68,-41.84) 73.68,-41.78 72,-40.1 ; v2(88.13,-39.96) 88.034,-40.056 87.681,-40.056 87.636,-40.1 72,-40.1 ; C107.1@97.66,-24.13 97.66,-23.97 97.96,-23.67 v3(100.889,-23.67) ; C105.1@104.34,-22.67 104.97,-22.04 v3(104.97,-21.48) ; C110.2@104.74,-30.61 105.96,-30.61 v3(105.97,-30.62) ; C108.2@109.39,-24.67 109.346,-24.626 109.346,-22.922 v3(109.341,-22.917) 109.346,-22.912 109.346,-20.144 C109.2@109.57,-19.92 ; v3(109.47,-30.08) 111.05,-31.66 C112.2@111.05,-32.09 ; C111.2@109.59,-28.21 109.63,-28.17 v3(110.87,-28.17) ; LED107.2@132,-27 132.271,-27 132.871,-27.6 154.98,-27.6 156.43,-26.15 v1(156.43,-25.75) ; 156.43,-26.33 160.3,-30.2 v2(163.7,-30.2) ; C207.2@177.69,-41.92 C207.2@177.69,-41.57 ; v4@179.06,-43.27 180.48,-41.85 184.45,-41.85 185.764,-41.85 187.359,-41.85 v2(187.361,-41.848) ; C208.2@186.55,-34.66 187.578,-35.688 187.578,-38.301 v2(188.64,-39.363) ; v2(192.25,-39.61) 192.25,-39.095 194.169,-37.176 194.814,-37.176 v2(195.59,-36.4) ; C209.2@197.24,-39.35 197.54,-39.65 198.52,-39.65 199.01,-40.14 199.01,-48.33 v2(200.03,-49.35)
  Bottom Layer w0.7: 80.704,-27.964 v3@101.163,-27.964
  Bottom Layer w1: v2(37.33,-56.55) 39.13,-56.55 40.37,-57.79 ; 39.021,-56.51 40.547,-58.036 40.547,-65.514 42.835,-67.801 55.778,-67.801 62.239,-61.34 136.85,-61.34 139.437,-63.927 139.73,-64.22 141.586,-64.22 cw(c142,-68.5) 142.414,-64.22 157.428,-64.22 172.36,-49.288 v2(172.36,-49.23) 172.56,-49.23 173.73,-48.06 v2(173.97,-48.06) ; v2(41.93,-52) 44.89,-49.04 46.89,-49.04 53.24,-42.69 56.791,-39.139 63.211,-39.139 64.404,-37.946 64.404,-37.231 LED103.2@64.5,-37.231 ; CN9.2@78.94,-26.2 80.704,-27.964 ; v3(172.84,-38.54) 172.84,-46.93 v2@173.907,-47.998 ; v2@174.12,-48.21 179.04,-43.29 v4(179.04,-43.27) ; C207.2@177.69,-41.92 v4(179.04,-43.27) ; v4@179.06,-43.27 v4(179.04,-43.27) ; v2@187.4,-44.042 v2(187.4,-46.786) 187.4,-49.53 187.45,-49.58 C211.2@187.65,-49.58 ; v2(195.59,-36.4) 196.135,-35.855 196.135,-35.035 C210.2@196.2,-35.035
  other v3: 101.52,-27.974
V3.3A: C214.2 C218.1 C219.2 C226.2 FT201.2 T201.3 U201.2 | length 64.3
  Top Layer w0.3: U201.2@197.69,-47.21 201.75,-47.21 201.934,-47.394 202.644,-47.394 205.55,-50.3 C219.2@205.9,-50.3 205.92,-50.28 C218.1@208.03,-50.28 209.7,-50.28 v2(211.05,-48.93) ; C226.2@208.32,-16.66 v2(209.87,-16.66)
  Bottom Layer w0.3: C214.2@204.8,-47.99 204.8,-48.34 205.8,-49.34 210.451,-49.34 210.861,-48.93 v2(211.05,-48.93) 210.72,-48.6 210.72,-17.51 v2(209.87,-16.66) 209.875,-16.665 217.415,-16.665 T201.3@217.42,-16.67
V3.3P: C308.1 C309.2 CN102.1 E302.3 | length 21.2
  Top Layer w0.75: CN102.1@153.77,-54.87 CN102.1@153.78,-54.86 ; C309.2@167.665,-54.421 167.665,-54.335 C309.2@167.84,-54.16 ; C309.2@168.19,-54.16 C309.2@167.84,-54.16 ; C308.1@171.6,-54.44 171.6,-54.275 171.375,-54.05 169.82,-54.05 169.47,-54.05 169.33,-54.05 168.98,-54.05 168.19,-54.05 167.95,-54.05 C309.2@167.84,-54.16
  Top Layer w1: CN102.1@153.78,-54.86 167.226,-54.86 C309.2@167.665,-54.421 ; 169.33,-54.05 169.82,-53.56 E302.3@169.82,-51.91
V5: CN102.31 CN102.32 CN102.33 CN102.34 F301.2 | length 63.2
  Top Layer w1: F301.2@69.08,-56.79 69.08,-56.68 69.13,-56.63 70.837,-56.63 v2(70.848,-56.63) 71.87,-56.63 v2(72.01,-56.77) ; CN102.34@113.13,-57.41 CN102.33@113.13,-54.87 CN102.31@115.67,-54.87 CN102.32@115.67,-57.41
  Bottom Layer w1: v2(70.848,-56.63) 71.83,-56.63 74.23,-59.03 111.51,-59.03 CN102.34@113.13,-57.41 CN102.34@113.13,-57.03 ; CN102.33@113.13,-54.87 CN102.34@113.13,-57.03 ; CN102.32@115.67,-57.41 CN102.31@115.67,-54.87 113.51,-57.03 CN102.34@113.13,-57.03
V5A: C300.1 C312.2 C401.1 C402.2 E300.3 U401.8 U402.2 | length 84.3
  Top Layer w0.5: U402.2@120.79,-19.15 121.563,-19.15 121.609,-19.104 121.609,-19.054 121.933,-18.73 121.942,-18.73 122.44,-18.232 124.322,-16.35 129.778,-16.35 131.22,-17.792 131.22,-21.878 132.372,-23.03 133.8,-23.03 ; C401.1@130.04,-35.4 130.4,-35.76 132.71,-35.76 136.709,-35.76 ; U401.8@136.92,-21.62 135.21,-21.62 133.8,-23.03 ; E300.3@169.81,-41.17 166.95,-41.17 C300.1@166.6,-41.52 166.34,-41.26 162.95,-41.26 161.88,-40.19 149.88,-40.19 147.01,-43.06 144.11,-43.06 142.69,-41.64 142.69,-37.92 141.924,-37.154 141.924,-37.126 140.558,-35.76 136.709,-35.76 ; 133.8,-23.03 134.214,-23.03 134.227,-23.043 135.14,-23.956 135.14,-30.981 136.13,-31.971 136.13,-35.181 136.709,-35.76
V5LCD: C301.1 C302.2 C411.1 CN400.1 CN400.2 CN400.3 E301.3 | length 22.5
  Top Layer w1: C302.2@78.07,-49.88 78.12,-49.83 81.524,-49.83 C301.1@81.54,-49.846 ; E301.3@80.39,-52.25 80.89,-52.25 80.89,-51.75 81.44,-51.2 81.44,-49.946 C301.1@81.54,-49.846 ; C411.1@94.35,-50.05 92.53,-50.05 90.426,-47.946 89.696,-47.946 CN400.2@89.6,-47.85 CN400.1@87.6,-47.85 CN400.3@87.6,-49.85 87.504,-49.946 84.484,-49.946 81.64,-49.946 C301.1@81.54,-49.846
V12: CN102.24 CN102.26 F302.1 | length 10
  Top Layer w0.75: CN102.26@123.29,-57.41 CN102.24@125.83,-57.41 125.83,-62.92 126.805,-63.895 126.98,-64.07 F302.1@127.33,-64.07
V12S: CN103.11 CN103.13 CN104.11 CN104.13 F302.2 | length 183.2
  Top Layer w0.5: F302.2@127.33,-67.27 127.33,-68.571 129.509,-70.75 135.05,-70.75 140.41,-65.39 161.745,-65.39 163.959,-67.604 164.492,-67.604 v2(164.588,-67.7)
  Bottom Layer w0.5: CN103.13@97.77,-69.8 CN103.11@100.31,-69.8 103.48,-72.97 159.19,-72.97 164.556,-67.604 165.037,-67.604 165.062,-67.58 166.66,-67.58 166.673,-67.567 167.087,-67.567 167.1,-67.58 180.785,-67.58 186.335,-62.03 212.02,-62.03 221.61,-71.62 223.7,-71.62 224.604,-70.716 224.604,-69.926 CN104.13@224.77,-69.76 CN104.11@227.31,-69.76
pads on no net: CN9.3 CN9.4 CN103.9 CN104.9 CN400.4 RJ201.0 SC301. T201.6 T201.7 U101.78 U201.3 U201.28 U201.29 U201.30 U201.31 U201.32 U201.33 U201.34 U201.35 U201.67 U201.68 U201.69 U201.70 U201.71 U201.74 U201.75 U201.76 U201.77 U201.78 U201.79 U201.80 U201.81 U201.82 U201.85 U201.86 U201.87 U201.91 U201.98 U201.99 U201.100 U402.1 U402.7 U402.8 U403.3 U403.8 U403.10 U404.7 U404.10

## Polygon pours and split planes (outlines as drawn)
GND on Top Layer "Top GND" (hatched 90Degree grid 0.3 track 0.3, remove dead copper, pour order 1011): -0.01,0.005 196.49,0.005 196.5,-6.505 196.5,-24.255 196.5,0.015 263.99,0.005 264,-75.64 0,-75.64
NetC228_1 on Top Layer "Top Layer-C228" (hatched 90Degree grid 0.3 track 0.3, remove dead copper, pour order 1012): 225.94,-25.15 225.94,-13.32 229.82,-13.32 229.82,-16.71 231.28,-18.17 238.67,-18.17 240.23,-16.61 240.23,-13.15 247.54,-13.15 247.54,-25.15
GND on Bottom Layer "Bottom GND" (solid, remove dead copper, pour order 1010): 0,0 264,0 264,-75.64 0,-75.64
NetC228_1 on Bottom Layer "Bottom Layer-C228" (hatched Horizontal grid 0.3 track 0.3, pour order 1013): 225.94,-25.15 225.94,-13.32 229.82,-13.32 229.82,-16.71 231.28,-18.17 238.67,-18.17 240.23,-16.61 240.23,-13.15 247.54,-13.15 247.54,-25.15

## Keep-outs
Keep-Out Layer:
  the board outline again, w0.2

## Other copper
Top Layer:
  rectangle net V5: 113.53,-57.6 115.67,-55.31
  pour cut-out: 220.06,-5.56 220.21,-5.41 248.6,-5.41 248.6,-26.76 220.03,-26.76
Bottom Layer:
  rectangle net V5: 113.13,-57.41 115.67,-54.87
  pour cut-out: 219.85,-5.31 248.42,-5.31 248.42,-26.66 219.85,-26.66 219.82,-26.63

## Silkscreen, mask and mechanical layers (free items; w line width, h text height)
Top Overlay:
  region: 222.15,-42.96 223.65,-44.46 224.95,-43.16 223.65,-43.16 223.65,-43.06 223.05,-43.06 223.05,-42.96
  region: 221.35,-42.16 221.95,-42.76 223.05,-42.76 223.05,-42.66 223.65,-42.66 223.65,-42.56 225.55,-42.56 225.75,-42.36 222.95,-42.36 222.95,-42.26 222.35,-42.26 222.35,-42.16
  region: 221.95,-38.16 221.35,-38.76 222.35,-38.76 222.35,-38.66 222.95,-38.66 222.95,-38.56 225.75,-38.56 225.55,-38.36 223.65,-38.36 223.65,-38.26 223.05,-38.26 223.05,-38.16
  region: 222.15,-37.96 223.05,-37.96 223.05,-37.86 223.65,-37.86 223.65,-37.76 224.95,-37.76 223.65,-36.46
  region: 221.15,-38.96 220.55,-39.56 221.65,-39.56 221.65,-39.46 222.25,-39.46 222.25,-39.36 226.55,-39.36 226.35,-39.16 222.95,-39.16 222.95,-39.06 222.35,-39.06 222.35,-38.96
  region: 220.35,-39.76 221.65,-39.76 221.65,-39.86 222.25,-39.86 222.25,-39.96 227.15,-39.96 227.35,-40.16 221.55,-40.16 221.55,-40.26 220.95,-40.26 220.95,-40.36 219.75,-40.36
  region: 219.75,-40.56 220.95,-40.56 220.95,-40.66 221.55,-40.66 221.55,-40.76 227.35,-40.76 227.15,-40.96 222.25,-40.96 222.25,-41.06 221.65,-41.06 221.65,-41.16 220.35,-41.16
  region: 220.55,-41.36 221.15,-41.96 222.35,-41.96 222.35,-41.86 222.95,-41.86 222.95,-41.76 226.35,-41.76 226.55,-41.56 222.25,-41.56 222.25,-41.46 221.65,-41.46 221.65,-41.36
  text "f" at 228.32,-42.07 h8
  text "ara" at 230.52,-42.07 h6
  text "a" at 238.42,-42.07 h8.75
  text "frand" at 242.42,-42.07 h6
  text "FAFMADMU_ControlPanel-V3-031115" at 221.09,-50.26 h2.5
Mechanical 1:
  lines w0.2: 11.5,-65 11.5,-9 125.5,-9 125.5,-65 ; 252.5,-65.05 138.5,-65.05 138.5,-9 252.5,-9 252.5,-65
Mechanical 15:
  circle w0.2: c32,-65 r5
  circle w0.2: c32,-65 r5
  circle w0.2: c32,-65 r5
  circle w0.2: c32,-65 r5
  circle w0.2: c64.5,-37 r4
  circle w0.2: c64.5,-65 r4
  circle w0.2: c64.5,-51 r4
  circle w0.2: c64.5,-23 r4
  circle w0.2: c64.5,-9 r4
  circle w0.2: c44.5,-65 r4
  circle w0.2: c45,-37 r5
  circle w0.2: c19.5,-37 r5
  circle w0.2: c32,-65 r5
  circle w0.2: c32,-49.5 r5
  circle w0.2: c32,-24.5 r5
  circle w0.2: c32,-9 r5
  circle w0.2: c132,-27 r4
  circle w0.2: c132,-47 r4
  lines w0.2: 117.15,-84.2 117.15,-45.65 ; 220.15,-5.15 248.72,-5.15 ; 220.15,-5.03 220.15,-26.38 248.72,-26.38 248.72,-5.03 ; 11.5,-72 125.5,-72 125.5,-2 11.5,-2 11.5,-72 ; 85.65,-73 85.65,-1 178.35,-1 178.35,-73 85.65,-73 ; 86.33,-57.13 86.33,-46.56 90.87,-46.56 90.87,-57.13 86.33,-57.13 ; 97.21,-63.28 97.21,-10.72 167.29,-10.72 167.29,-63.28 97.21,-63.28 ; 138.5,-72 138.5,-2 252.5,-2 252.5,-72 138.5,-72 ; 172.54,-58.63 172.54,-33.23 177.62,-33.23 177.62,-58.63 172.54,-58.63
  lines w0.254: 90.09,-73 118.13,-73 118.13,-64.03 90.09,-64.03 90.09,-73 ; 217.09,-73.03 217.09,-64.03 245.13,-64.03 245.13,-73.03 217.09,-73.03
Mechanical 16:
  lines w0.3: 225.94,-25.15 225.94,-13.32 229.82,-13.32 229.82,-16.71 231.28,-18.17 238.67,-18.17 240.23,-16.61 240.23,-13.15 247.54,-13.15 247.54,-25.15

## Dimensions
0,-75.64 to -0.02,-74.03 on Mechanical 1

## Text inside footprints (layer, text, board x,y; h text height)
C406: Top Overlay "+" at 175.86,-13.965 h1
CN9: Top Overlay "6" at 79.448,-19.596 h1 r90; Top Overlay "5" at 81.988,-19.596 h1 r90; Top Overlay "2" at 79.448,-28.74 h1 r90; Top Overlay "1" at 81.988,-28.232 h1 r90
CN103: Bottom Overlay "2" at 115.55,-67.768 h1; Bottom Overlay "1" at 115.55,-70.308 h1
CN104: Bottom Overlay "1" at 242.55,-70.268 h1; Bottom Overlay "2" at 242.55,-67.728 h1
CN400: Bottom Overlay "10" at 93.23,-56.44 h1; Bottom Overlay "9" at 85.79,-56.65 h1; Bottom Overlay "1" at 85.59,-48.34 h1; Bottom Overlay "2" at 92.44,-48.31 h1
LED101: Bottom Overlay "-" at 66.2,-7.19 h1 r270; Bottom Overlay "+" at 67.57,-9.75 h1
LED105: Bottom Overlay "-" at 45.42,-66.908 h1 r180; Bottom Overlay "+" at 42.626,-66.908 h1 r180
LED106: Bottom Overlay "-" at 65.42,-66.908 h1 r180; Bottom Overlay "+" at 62.626,-66.908 h1 r180
LED107: Bottom Overlay "-" at 135.31,-24.02 h1 r90; Bottom Overlay "+" at 134.94,-27.76 h1
LED108: Bottom Overlay "-" at 130.74,-49.87 h1; Bottom Overlay "+" at 133.78,-49.99 h1